# Altium PCB LimeFEA-mPCIe_1v0.PcbDoc (part 2 of 2)
Units mm, origin at the board's own origin, x right, y up, seen from the top; angles counter-clockwise.
Board outline 100 x 70 mm, 4 copper layers (Top Layer, Mid-Layer 1, Mid-Layer 2, Bottom Layer), stack 1.48 mm thick; 102 components, 83 nets, 520 pads, 498 vias.
Unrouted connection lines stored in the file: 11.
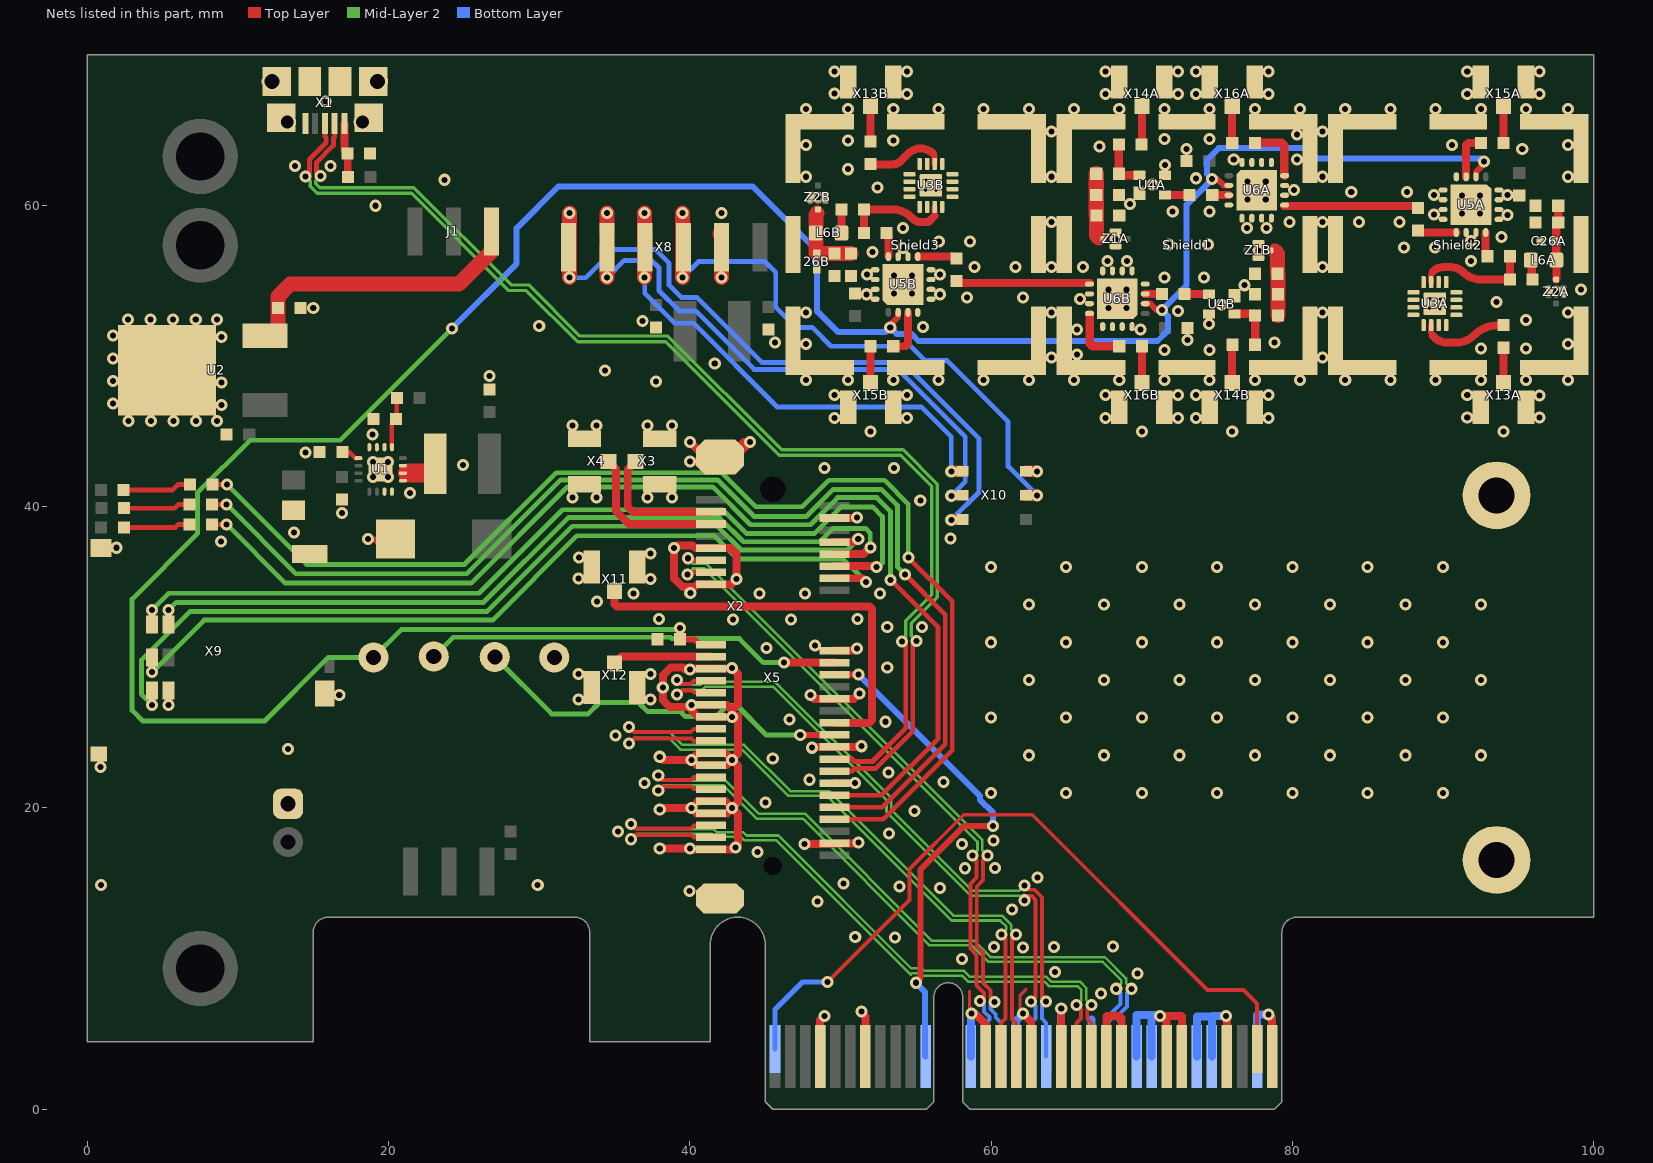
[diagram p4: the nets of this part, all layers, seen from the top]

## Via types
v1: diameter 0.8, hole 0.4, Top Layer to Bottom Layer, tented both sides, 470 vias
v2: diameter 0.8, hole 0.4, Top Layer to Bottom Layer, tented top, 20 vias
v3: diameter 0.4, hole 0.2, Top Layer to Bottom Layer, tented both sides, 8 vias

## Nets (pads, with @x,y where several pads share a name; then routed paths per layer and width w, separated by ;. In a path a pad name is that pad's centre, name@x,y a point inside that pad or via, vN(x,y) a via of type N, cw(c..) or ccw(c..) an arc to the next point about the centre after c; other vN are vias at no path point) (continued)
GND: 26B.1 C1.2 C2.2 C3.1 C4.2 C7.1 C8.2 C9.1 C10.1 C11.1 C12.1 C15A.2 C15B.2 C16A.2 C16B.2 C18A.2 C18B.2 C19A.2 C19B.2 C23A.2 C23B.2 C24A.2 C24B.2 C26A.1 GND1.1 R4.2 R6.1 Shield1.0 Shield2.0 Shield3.0 U1.0 U1.6 U1.7 U1.8 U1.15 U1.16 U2.2 U3A.1 U3A.3 U3A.4 U3A.5 U3A.6 U3A.7 U3A.8 U3A.9 U3A.10 U3A.12 U3A.13 U3A.14 U3A.15 U3A.16 U3A.PAD U3B.1 U3B.3 U3B.4 U3B.5 U3B.6 U3B.7 U3B.8 U3B.9 U3B.10 U3B.12 U3B.13 U3B.14 U3B.15 U3B.16 U3B.PAD U4A.2 U4A.4 U4B.2 U4B.4 U5A.0 U5A.4 U5A.5 U5A.6 U5A.7 U5A.8 U5A.10 U5A.11 U5A.13 U5A.14 U5A.15 U5A.16 U5B.0 U5B.4 U5B.5 U5B.6 U5B.7 U5B.8 U5B.10 U5B.11 U5B.13 U5B.14 U5B.15 U5B.16 U6A.0 U6A.4 U6A.5 U6A.6 U6A.7 U6A.8 U6A.10 U6A.11 U6A.13 U6A.14 U6A.15 U6A.16 U6B.0 U6B.4 U6B.5 U6B.6 U6B.7 U6B.8 U6B.10 U6B.11 U6B.13 U6B.14 U6B.15 U6B.16 X1.0 X1.5 X2.A4 X2.A12 X2.A15 X2.A18 X2.A20 X2.A23 X2.A24 X2.A27 X2.A28 X2.A31 X2.B4 X2.B7 X2.B13 X2.B16 X2.B18 X2.B21 X2.B22 X2.B25 X2.B26 X2.B29 X2.B32 X3.2 X4.2 X5.0 X5.4 X5.9 X5.15 X5.18 X5.21 X5.26 X5.27 X5.29 X5.34 X5.35 X5.37 X5.40 X5.43 X5.45 X5.50 X5.51 X6.0 X7.0 X8.5 X9.0 X9.5 X10.6 X11.2 X12.2 X13A.2 X13B.2 X14A.2 X14B.2 X15A.2 X15B.2 X16A.2 X16B.2 X17.1 Z1A.2 Z1B.2 Z2A.2 Z2B.2 | length 164.7
  Top Layer w0.203: 58.548,7.851 58.548,6.502 v1(58.7,6.35) ; v1(62.125,6.35) 61.925,6.55 61.925,7.58 62.32,7.975
  Top Layer w0.53: C8.2@19.225,37.787 19.425,37.587 C8.2@20.775,37.587 ; v1(38,17.3) v1(40,17.3) 40.002,17.3 40.101,17.201 40.15,17.25 X5.51@41.4,17.25 v1@42.8,17.25 ; v1(38,19.9) 38.1,20 v1(40.1,20) ; v1(38,23.4) 38.2,23.2 v1(40.1,23.2) ; v1(40,43) 41.7,43 X5.0@42,43.3 ; v1(40,44.3) 41,43.3 X5.0@42,43.3 ; X5.0@42.3,43 43.6,44.3 v1(44,44.3) ; v1(43.025,17.375) 43.2,17.55 43.2,19.6 v1(42.8,20) ; v1@44.002,44.302 42.5,42.8 X5.0@42,43.3 ; v1(47.6,17.6) 49.55,17.6 X5.50@49.6,17.65 51.15,17.65 v1(51.2,17.7) ; v1(48,27.5) 48.25,27.25 X5.26@49.6,27.25 50.9,27.25 v1(51.25,27.6) ; v1(48.1,24) 48.15,24.05 X5.34@49.6,24.05 51.05,24.05 51.1,24.1 v1(51.4,24.1) ; X2.B4@48.65,3.5 48.65,5.9 v1(48.95,6.2) ; X5.40@49.6,21.65 v1(50.95,21.65) ; X5.18@49.6,30.45 50.95,30.45 v1(51.1,30.6) ; v1@50.95,39.25 51.076,39.25 v1(51.102,39.277) ; v1(51.4,6.5) 51.4,6.4 51.65,6.15 X2.B7@51.65,3.5 ; v1(58.7,6.35) 58.925,6.35 59.65,5.625 X2.B13@59.65,3.5 ; v1(62.125,6.35) 62.65,5.825 X2.B16@62.65,3.5 ; X2.B18@64.65,3.5 v1(64.65,6.7) ; X2.B21@67.65,3.5 67.65,6.15 67.7,6.2 68.5,6.2 68.65,6.05 X2.B22@68.65,3.5 ; X2.B25@71.65,3.5 71.65,6.2 v1(71.2,6.2) 72.6,6.2 72.65,6.15 X2.B26@72.65,3.5 ; v1(75.6,6.2) 75.65,6.15 X2.B29@75.65,3.5 ; v1(78.4,6.3) 78.65,6.05 X2.B32@78.65,3.5 ; v1(40.1,20) 40.55,20.45 X5.43@41.4,20.45 42.35,20.45 v1(42.8,20) ; v1(40.1,20) 40.45,19.65 X5.45@41.4,19.65 42.45,19.65 v1(42.8,20) ; v1(40.1,23.2) 40.55,23.65 X5.35@41.4,23.65 42.35,23.65 v1(42.8,23.2) ; v1(40.1,23.2) 40.45,22.85 X5.37@41.4,22.85 42.45,22.85 v1(42.8,23.2) ; v1(40.1,26.825) 39.985,26.71 38.665,26.71 38.2,27.175 v1(38.2,28) 38.2,28.8 38.74,29.34 39.549,29.34 39.689,29.2 v1(40,29.2) 40.05,29.25 X5.21@41.4,29.25 42.75,29.25 v1(42.8,29.3) 43.2,28.9 43.2,26.9 42.8,26.5 ; v1(40.1,26.825) 40.425,26.825 40.45,26.85 X5.27@41.4,26.85 42.45,26.85 42.8,26.5 ; v1(40.1,26.825) 40.1,26.5 40.55,26.05 X5.29@41.4,26.05 v1(42.8,26.05) ; v1(42.8,20) 43.2,20.4 43.2,22.8 v1(42.8,23.2) ; v1(42.8,23.2) 43.2,23.6 43.2,26.1 43.15,26.05 v1(42.8,26.05) ; v1(42.8,26.05) 42.8,26.5 ; 38.952,35.249 v1(38.952,37.252) 39.13,37.43 40.183,37.43 40.363,37.25 X5.9@41.4,37.25 42.7,37.25 43.1,36.85 v1(43.1,35.2) 42.75,34.85 X5.15@41.4,34.85 40.5,34.85 40.32,34.67 39.531,34.67 38.952,35.249
  Top Layer w0.56: X9.0@0.95,37.32 0.995,37.275 v1(1.925,37.275) ; v1(5.4,26.825) X9.5@5.4,27.81 ; X5.4@49.6,39.25 v1@50.95,39.25
  Top Layer w0.75: X10.6@62.3,42.35 v1(63.05,42.35)
  Top Layer w1: v1(42.1,55.2) 42.1,58.015 42,58.115 X8.5@42.11,58.225
  Bottom Layer w0.53: X2.A4@48.65,3.5 48.65,5.9 v1(48.95,6.2) ; X2.A12@58.65,3.5 58.65,6.3 v1(58.7,6.35) ; X2.A15@61.65,3.5 61.65,5.875 v1(62.125,6.35) ; X2.A18@64.65,3.5 v1(64.65,6.7) ; X2.A20@66.65,3.5 66.65,5.95 ; X2.A23@69.65,3.5 69.65,6.25 70.7,6.25 ; X2.A24@70.65,3.5 70.65,6.2 70.7,6.25 ; v1(71.2,6.2) 71.15,6.25 70.7,6.25 ; X2.A27@73.65,3.5 73.65,6.15 74.65,6.15 ; X2.A28@74.65,3.5 74.65,6.15 ; v1(75.6,6.2) 74.7,6.2 74.65,6.15 ; X2.A31@77.65,3.5 77.65,6.25 77.7,6.3 v1(78.4,6.3)
  other v1: 67.3,7.7 69.7,9 64.225,9.125 58.075,9.975 62.1,10.75 60.2,10.775 64.175,10.775 68.1,10.8 53.625,11.4 50.975,11.425 61.375,13.275 48.475,13.8 39.977,14.476 56.6,14.7 53.9,14.8 0.9,14.9 29.9,14.9 50.2,15 63.075,15.375 58.25,16 60.25,16.025 44.5,17.075 58.05,17.6 60.15,17.85 53.225,18.3 35.225,18.425 54.9,19.8 45.025,20.375 60,21 64.98,21 70,21 74.98,21 80,21 84.98,21 90,21 37,21.65 56.825,21.725 47.925,21.875 53.17,22.35 0.875,22.725 45.5,23.3 62.5,23.5 67.5,23.5 72.5,23.5 77.5,23.5 82.5,23.5 87.5,23.5 92.5,23.5 13.335,23.912 35.075,24.825 52.975,25.725 46.625,25.889 60,26 64.98,26 70,26 74.98,26 80,26 84.98,26 90,26 32.6,27.2 37.4,27.2 16.725,27.5 62.5,28.5 67.5,28.5 72.5,28.5 77.5,28.5 82.5,28.5 87.5,28.5 92.5,28.5 32.6,28.9 37.4,28.9 53.1,29.325 45.1,30.632 48.3,30.775 60,31 64.98,31 70,31 74.98,31 80,31 84.98,31 90,31 53.1,32 55.403,32.027 42.85,32.525 46.725,32.525 37.95,32.55 51.125,32.55 62.5,33.5 67.5,33.5 72.5,33.5 77.5,33.5 82.5,33.5 87.5,33.5 92.5,33.5 33.825,33.7 36.25,34.25 44.625,34.25 47.65,34.25 52.625,34.25 40.025,34.275 37.4,35.2 32.6,35.225 60,36 64.98,36 70,36 74.98,36 80,36 84.98,36 90,36 32.625,36.625 37.4,36.9 8.875,37.7 18.625,37.846 57.3,37.9 13.725,38.3 16.9,39.575 55.292,40.425 32.2,40.6 33.8,40.6 37.2,40.6 38.8,40.6 21.427,40.9 48.925,42.575 53.55,42.575 24.928,42.775 14.493,43.6 18.937,44.794 52,45 70,45 76,45 94,45 32.2,45.4 33.8,45.4 37.2,45.4 38.8,45.4 2.725,45.675 4.225,45.675 5.725,45.675 7.225,45.675 8.6,45.675 49.6,45.9 54.4,45.9 67.6,45.9 72.4,45.9 73.6,45.9 78.4,45.9 91.6,45.925 96.4,45.925 8.9,46.75 1.7,46.85 96.4,47.375 49.6,47.4 54.4,47.4 67.6,47.4 72.4,47.4 73.6,47.4 78.4,47.4 91.6,47.4 8.9,48.25 37.745,48.3 1.7,48.35 47.7,48.4 50.5,48.4 53.5,48.4 56.5,48.4 59.5,48.4 62.5,48.4 65.5,48.4 68.5,48.4 71.5,48.4 74.5,48.4 77.5,48.4 80.5,48.4 83.5,48.4 86.5,48.4 89.5,48.4 92.5,48.4 95.5,48.4 98.3,48.4 26.688,48.669 34.363,49.037 41.65,49.5 1.7,49.85 64,49.9 82,49.9 65.7,50.1 71.5,50.4 74.5,50.4 92.5,50.5 95.5,50.5 47.7,50.8 98.3,50.8 45.65,50.9 78.8,50.9 73.025,51.05 8.9,51.25 1.7,51.35 65.7,51.75 69.9,51.75 55.475,51.925 30,52 74.45,52.125 36.85,52.325 95.5,52.4 2.7,52.425 4.2,52.425 5.7,52.425 7.2,52.425 8.6,52.425 47.7,52.9 64,52.9 82,52.9 98.3,52.9 72.4,53 15,53.2 75.3,53.425 93.55,53.6 65.9,53.8 58.4,53.9 62.1,53.9 51.725,54.1 56.6,54.1 97.5,54.275 99.15,54.407 76.8,54.7 71.5,55.2 74.125,55.2 51.75,55.425 56.6,55.425 58.9,55.9 61.6,55.9 64,55.9 66.1,55.9 82,55.9 67.725,56.3 69.025,56.3 91.85,56.3 52.125,56.9 77.737,57.019 54.15,57.175 87.4,57.2 89.45,57.2 71.8,57.4 74.4,57.4 56.55,57.6 58.6,57.6 91.85,57.625 68.263,57.781 93.875,57.9 54.15,58.5 76.975,58.5 78.275,58.5 64,58.9 79.8,58.9 82,58.9 84.4,58.9 87.1,58.9 94.275,59.375 89.4,59.4 42.1,59.5 72.05,59.6 74.5,59.6 19.125,59.975 69.2,60.1 48.5,60.525 89.4,60.7 94.275,60.7 83.9,60.9 87.6,60.9 80.1,61.025 52.45,61.2 70.7,61.375 23.7,61.7 73.6,61.8 47.7,61.9 64,61.9 82,61.9 98.3,61.9 50.5,62.4 13.775,62.625 16.15,62.625 71.55,62.675 76.1,63.05 80.3,63.05 72.975,63.75 95.25,63.75 67.2,63.9 47.7,64 90.6,64 98.3,64 50.5,64.3 53.5,64.3 71.5,64.4 74.5,64.4 80.3,64.7 64,64.9 82,64.9 47.7,66.4 50.5,66.4 53.5,66.4 56.5,66.4 59.5,66.4 62.5,66.4 65.5,66.4 68.5,66.4 71.5,66.4 74.5,66.4 77.5,66.4 80.5,66.4 83.5,66.4 86.5,66.4 89.5,66.4 92.5,66.4 95.5,66.4 98.3,66.4 15.8,66.9 54.4,67.4 67.6,67.4 72.4,67.4 73.6,67.4 78.4,67.4 91.6,67.4 96.4,67.4 49.6,67.425 49.6,68.875 54.4,68.875 67.6,68.9 72.4,68.9 73.6,68.9 78.4,68.9 91.6,68.9 96.4,68.9
  other v2: 18.975,41.975 19.975,41.975 18.975,42.975 19.975,42.975 67.775,53.2 68.975,53.2 53.55,54.15 54.75,54.15 67.775,54.4 68.975,54.4 53.55,55.35 54.75,55.35 91.25,59.45 92.45,59.45 77.025,60.4 78.225,60.4 91.25,60.65 92.45,60.65 77.025,61.6 78.225,61.6
  other v3: 89.775,53.125 89.1,53.15 89.8,53.8 89.125,53.825 56.325,60.975 55.65,61 56.35,61.65 55.675,61.675
GPIO1: X3.1 X5.3 | length 8.9
  Top Layer w0.53: X3.1@36.4,43 35.875,42.475 35.875,40 36.225,39.65 X5.3@41.4,39.65
GPIO2: X4.1 X5.5 | length 10.2
  Top Layer w0.53: X4.1@34.6,43 35.1,42.5 35.1,39.7 35.95,38.85 X5.5@41.4,38.85
GPIO8: GPIO8.1 X5.32 | length 25.9
  Top Layer w0.4: v1(47.325,24.85) X5.32@49.6,24.85
  Mid-Layer 2 w0.33: GPIO8.1@27.05,30.025 30.825,26.25 33.25,26.25 34,27 36.595,27 36.685,26.91 36.685,26.904 37.104,26.485 37.11,26.485 37.198,26.398 37.2,26.4 39.375,26.4 39.7,26.075 41.749,26.075 42.474,26.8 43.126,26.8 45.076,24.85 v1(47.325,24.85)
LED_WLAN#_GPIO6: R8.1 X5.44 | length 78.4
  Top Layer w0.32: R8.1@8.275,40.139 9.239,40.139 v1(9.25,40.15) ; X5.44@49.6,20.05 52.775,20.05 56.945,24.22 56.945,32.834 v1(54.278,35.502)
  Mid-Layer 2 w0.32: v1(9.25,40.15) 13.85,35.55 25.2,35.55 31.43,41.78 41.832,41.78 44.262,39.35 47.725,39.35 49.525,41.15 52.71,41.15 53.79,40.07 53.79,35.989 v1(54.278,35.502)
LED_WPAN#_GPIO7: R9.1 X5.46 | length 80.5
  Top Layer w0.32: R9.1@8.305,41.475 v1(9.28,41.476) ; X5.46@49.6,19.25 52.825,19.25 57.415,23.84 57.415,33.71 v1(54.5,36.625)
  Mid-Layer 2 w0.32: v1@9.25,41.475 14.56,36.165 25.04,36.165 31.125,42.25 42.125,42.25 44.385,39.99 47.456,39.99 49.216,41.75 52.925,41.75 54.5,40.175 v1(54.5,36.625)
LED_WWAN#_GPIO5: R7.1 X5.42 | length 76.3
  Top Layer w0.32: R7.1@8.275,38.824 v1@9.249,38.824 ; X5.42@49.6,20.85 49.61,20.84 52.715,20.84 56.475,24.6 56.475,31.99 v1(53.325,35.14)
  Mid-Layer 2 w0.32: v1(9.25,38.825) 13.15,34.925 25.492,34.925 31.877,41.31 41.515,41.31 44.025,38.8 48.005,38.8 49.805,40.6 52.415,40.6 53.313,39.701 53.313,35.152 v1(53.325,35.14)
MHZ_IN: X5.19 X12.1 | length 6.6
  Top Layer w0.53: X12.1@35,29.6 35.45,30.05 X5.19@41.4,30.05
MHZ_OUT: X5.30 X11.1 | length 28
  Top Layer w0.53: X11.1@35,34.4 35,33.525 35.15,33.375 51.925,33.375 52.08,33.22 52.08,25.83 51.9,25.65 X5.30@49.6,25.65
Net26B_2: 26B.2 C18B.1 C19B.1 L6B.1 Z2B.3 | length 4.9
  Top Layer w1: 26B.2@48.362,56.834 L6B.1@48.362,58.175 48.362,59.232 cw(c48.832,59.232) 48.431,59.477 ; 26B.2@48.481,56.815 C19B.1@49.6,56.815 C18B.1@50.68,56.815
NetC2_1: C2.1 L1.1 X1.1 | length 3.6
  Top Layer w0.5: X1.1@17.075,65.425 17.075,63.65 C2.1@17.275,63.45 17.3,63.425 L1.1@17.3,61.875
NetC4_1: C4.1 U1.9 | length 1.2
  Top Layer w0.3: C4.1@16.927,43.625 17.4,43.625 17.8,43.225 U1.9@18,43.225
NetC10_2: C10.2 J1.3 U2.3 | length 20.4
  Top Layer w1: U2.3@11.477,51.35 U2.3@11.8,51.35 12.5,51.35 12.654,51.504 C10.2@12.654,53.2 12.654,53.954 13.475,54.775 24.675,54.775 26.84,56.94 J1.3@26.84,58.275
NetC13A_1: C13A.1 X13A.1 | length 2.4
  Top Layer w0.53: X13A.1@94,48.2 C13A.1@94,50.55
NetC13A_2: C13A.2 U3A.2 | length 5.9
  Top Layer w0.4: U3A.2@89.2,52.05 89.2,51.634 ccw(c89.627,51.634) 89.325,51.332
  Top Layer w0.53: 89.325,51.332 89.444,51.213 ccw(c90.2,51.969) 90.2,50.9 90.917,50.9 ccw(c90.917,52.466) 92.024,51.359 cw(c93.693,49.69) 93.693,52.05 C13A.2@94,52.05 C13A.2@93.975,52.075
NetC13B_1: C13B.1 X13B.1 | length 2.4
  Top Layer w0.53: C13B.1@52,64.25 X13B.1@52,66.6
NetC13B_2: C13B.2 U3B.2 | length 5.3
  Top Layer w0.4: 56.14,63.45 cw(c55.875,63.185) 56.25,63.185 U3B.2@56.25,62.75
  Top Layer w0.53: C13B.2@52,62.75 52.025,62.725 53.487,62.725 ccw(c53.487,63.419) 53.978,62.928 54.495,63.445 cw(c55.292,62.647) 55.292,63.775 cw(c55.292,62.505) 56.14,63.45
NetC14A_1: C14A.1 X14A.1 | length 2.6
  Top Layer w0.53: C14A.1@69.975,64.05 70,64.075 X14A.1@70,66.6
NetC14A_2: C14A.2 L4A.2 U4A.1 | length 3.4
  Top Layer w0.56: C14A.2@68.475,64.05 L4A.2@68.475,62.1 68.575,62 U4A.1@69.85,62
NetC14B_1: C14B.1 X14B.1 | length 2.6
  Top Layer w0.53: X14B.1@76,48.2 76,50.725 C14B.1@76.025,50.75
NetC14B_2: C14B.2 L4B.2 U4B.1 | length 3.4
  Top Layer w0.56: U4B.1@76.15,52.8 77.425,52.8 L4B.2@77.525,52.7 C14B.2@77.525,50.75
NetC15A_1: C15A.1 C16A.1 L4A.1 Z1A.3 | length 4.4
  Top Layer w1: L4A.1@66.975,62.1 C16A.1@66.975,60.7 66.975,59.362 C15A.1@67,59.337 67,57.988 67.163,57.825
NetC15B_1: C15B.1 C16B.1 L4B.1 Z1B.3 | length 4.4
  Top Layer w1: 78.837,56.975 79,56.812 C15B.1@79,55.463 79.025,55.438 C16B.1@79.025,54.1 L4B.1@79.025,52.7
NetC17A_1: C17A.1 U6A.9 | length 9.1
  Top Layer w0.53: U6A.9@79.425,59.95 88.3,59.95 C17A.1@88.425,59.825
NetC17A_2: C17A.2 U5A.9 | length 2.5
  Top Layer w0.53: C17A.2@88.425,58.275 88.5,58.2 U5A.9@90.875,58.2
NetC17B_1: C17B.1 U6B.9 | length 9.1
  Top Layer w0.53: C17B.1@57.575,54.975 57.7,54.85 U6B.9@66.575,54.85
NetC17B_2: C17B.2 U5B.9 | length 2.5
  Top Layer w0.53: U5B.9@55.125,56.6 57.5,56.6 C17B.2@57.575,56.525
NetC18A_1: C18A.1 C19A.1 C26A.2 L6A.1 Z2A.3 | length 4.9
  Top Layer w0.56: Z2A.3@97.5,55.105 97.522,55.127 L6A.1@97.522,56.363 97.511,56.374 97.511,57.614 C26A.2@97.5,57.625 97.52,57.645 97.52,58.758 C18A.1@97.639,58.877 C19A.1@97.639,59.977
NetC20A_1: C20A.1 L5A.2 U3A.11 | length 7.7
  Top Layer w0.4: U3A.11@89.2,54.9 89.2,55.31 cw(c89.641,55.31) 89.329,55.622
  Top Layer w0.53: 89.329,55.622 cw(c90,54.951) 90,55.9 90.521,55.9 cw(c90.521,54.743) 91.339,55.561 ccw(c92.513,56.735) 92.513,55.075 L5A.2@94.438,55.075 C20A.1@94.438,56.625
NetC20A_2: C20A.2 U5A.12 | length 1.6
  Top Layer w0.53: U5A.12@92.825,58.2 92.825,56.738 C20A.2@92.938,56.625
NetC20B_1: C20B.1 L5B.2 U3B.11 | length 7.2
  Top Layer w0.4: 56.25,59.337 U3B.11@56.25,59.9
  Top Layer w0.53: C20B.1@51.562,58.175 L5B.2@51.562,59.725 53.487,59.725 cw(c53.487,58.065) 54.661,59.239 54.75,59.15 ccw(c55.354,59.754) 55.354,58.9 55.75,58.9 ccw(c55.75,59.124) 55.909,58.966 56.25,59.307
NetC20B_2: C20B.2 U5B.12 | length 1.6
  Top Layer w0.53: C20B.2@53.062,58.175 53.175,58.062 U5B.12@53.175,56.6
NetC21A_1: C21A.1 U6A.12 | length 4
  Top Layer w0.56: C21A.1@77.5,64.15 79.3,64.15 79.45,64 79.45,62 U6A.12@79.475,61.975
NetC21A_2: C21A.2 X16A.1 | length 2.5
  Top Layer w0.53: C21A.2@76,64.15 X16A.1@76,66.6
NetC21B_1: C21B.1 U6B.12 | length 4
  Top Layer w0.56: U6B.12@66.525,52.825 66.55,52.8 66.55,50.8 66.7,50.65 C21B.1@68.5,50.65
NetC21B_2: C21B.2 X16B.1 | length 2.5
  Top Layer w0.53: X16B.1@70,48.2 C21B.2@70,50.65
NetC22A_1: C22A.1 U4A.3 | length 1.6
  Top Layer w0.53: U4A.3@71.55,60.7 71.554,60.696 C22A.1@73.175,60.696
NetC22A_2: C22A.2 U6A.3 | length 1.1
  Top Layer w0.53: C22A.2@74.675,60.696 74.696,60.675 U6A.3@75.775,60.675
NetC22B_1: C22B.1 U4B.3 | length 1.6
  Top Layer w0.53: C22B.1@72.825,54.104 74.446,54.104 U4B.3@74.45,54.1
NetC22B_2: C22B.2 U6B.3 | length 1.1
  Top Layer w0.53: U6B.3@70.225,54.125 71.304,54.125 C22B.2@71.325,54.104
NetC25A_1: C25A.1 U5A.3 | length 3.1
  Top Layer w0.53: U5A.3@91.525,61.9 91.525,64 91.675,64.15 C25A.1@92.5,64.15
NetC25A_2: C25A.2 X15A.1 | length 2.5
  Top Layer w0.53: C25A.2@94,64.15 X15A.1@94,66.6
NetC25B_1: C25B.1 U5B.3 | length 3.1
  Top Layer w0.53: C25B.1@53.5,50.65 54.325,50.65 54.475,50.8 U5B.3@54.475,52.9
NetC25B_2: C25B.2 X15B.1 | length 2.5
  Top Layer w0.53: X15B.1@52,48.2 C25B.2@52,50.65
NetL2_1: L2.1 U1.1 U1.2 U1.3 | length 2.8
  Top Layer w1.27: 21.25,42.225 23.175,42.225 23.1,42.3 L2.1@23.1,43.025
NetL5A_1: L5A.1 L6A.2 | length 1.3
  Top Layer w0.56: L6A.2@95.822,56.363 95.88,56.305 95.88,55.133 L5A.1@95.938,55.075
NetL5B_1: L5B.1 L6B.2 | length 1.6
  Top Layer w0.53: L6B.2@50.062,58.175 L5B.1@50.062,59.725
NetLED1_1: LED1.1 R7.2 | length 4.4
  Top Layer w0.32: LED1.1@2.425,38.625 5.85,38.625 6.05,38.825 R7.2@6.775,38.824
NetLED2_1: LED2.1 R8.2 | length 4.4
  Top Layer w0.32: LED2.1@2.45,39.9 5.8,39.9 6.037,40.137 6.773,40.137 R8.2@6.775,40.139
NetLED3_1: LED3.1 R9.2 | length 4.5
  Top Layer w0.32: LED3.1@2.412,41.1 5.65,41.1 6.025,41.475 R9.2@6.774,41.475
NetR4_1: R4.1 R5.1 U1.5 | length 3.4
  Top Layer w0.3: U1.5@20.225,43.95 20.225,45.55 R4.1@20.5,45.825 20.546,45.871 R5.1@20.546,47.225
PCI_PERST#: X2.A11 X5.22 | length 34.2
  Top Layer w0.4: X5.22@49.6,28.85 v1(51.2,28.85) ; v1(55,8.4) 55.3,8.7 55.3,15.911 58.189,18.8 v1(60.125,18.8)
  Bottom Layer w0.4: v1(51.2,28.85) 59.242,20.808 59.242,20.558 60.125,19.675 v1(60.125,18.8) ; v1(55,8.4) 55.6,7.8 55.6,3.55 X2.A11@55.65,3.5
PCI_REF_CLK_N: X2.A14 X5.11 | length 44.7
  Top Layer w0.26: v1(59.75,16.85) 59.462,16.562 59.462,15.212 59.042,14.792 59.042,10.851 59.462,10.431 59.462,8.387 59.95,7.9 59.95,7.403 v1(60.228,7.125)
  Top Layer w0.32: v1@39.848,36.449 39.877,36.449 v1@39.947,36.449 ; v1(39.877,36.577) 39.877,36.519 v1@39.947,36.449 ; v1@39.949,36.447 v1@39.947,36.449 ; X5.11@41.4,36.45 40.27,36.45 v1@39.947,36.449
  Mid-Layer 2 w0.17: v1(39.877,36.577) 39.877,36.519 40.176,36.22 ; 40.178,36.218 40.176,36.22 ; v1(59.75,16.85) 59.41,17.19 59.41,17.886 41.078,36.218 40.882,36.218 40.88,36.22 40.176,36.22
  Bottom Layer w0.26: v1(60.228,7.125) 59.951,6.849 59.951,6.65 60.3,6.301 60.3,6.08 60.65,5.73 X2.A14@60.65,3.5
PCI_REF_CLK_P: X2.A13 X5.13 | length 44.6
  Top Layer w0.26: v1(58.75,16.85) 59.037,16.562 59.037,15.389 58.617,14.968 58.617,10.675 59.037,10.255 59.037,8.211 59.525,7.724 59.525,7.45 v1(59.25,7.175)
  Top Layer w0.32: v1@39.825,35.646 39.851,35.647 X5.13@40.775,35.65 ; 40.275,35.65 X5.13@40.775,35.65 ; X5.13@41.4,35.65 X5.13@40.775,35.65
  Mid-Layer 2 w0.17: v1(39.852,35.502) 39.848,35.502 39.825,35.525 40.198,35.898 40.945,35.898 59.09,17.754 59.09,17.19 v1(58.75,16.85)
  Bottom Layer w0.26: v1(59.25,7.175) 59.526,6.899 59.526,6.474 59.875,6.125 59.875,5.955 59.65,5.73 X2.A13@59.65,3.5
PCI_RX0_N: X2.B15 X5.31 | length 45.6
  Top Layer w0.26: v1(35.95,25.375) 36.287,25.037 40.058,25.037 40.27,25.25 X5.31@41.4,25.25 ; X2.B15@61.65,3.5 61.65,5.73 61.375,6.005 61.375,11.325 v1(61.65,11.6)
  Mid-Layer 2 w0.17: v1(35.95,25.375) 36.34,24.985 38.718,24.985 39.508,24.195 43.605,24.195 46.68,21.12 49.23,21.12 57.5,12.85 60.73,12.85 61.323,12.258 61.323,11.927 v1(61.65,11.6)
PCI_RX0_P: X2.B14 X5.33 | length 45
  Top Layer w0.26: v1(35.95,24.275) 36.287,24.612 ; 36.34,24.612 40.108,24.612 40.27,24.45 X5.33@41.4,24.45 ; X2.B14@60.65,3.5 60.65,5.73 60.95,6.03 60.95,11.325 v1(60.675,11.6)
  Mid-Layer 2 w0.17: v1(35.95,24.275) 36.34,24.665 38.585,24.665 39.375,23.875 43.472,23.875 46.547,20.8 49.097,20.8 57.367,12.53 60.597,12.53 61.003,12.125 61.003,11.928 v1(60.675,11.6)
PCI_RX1_N: X2.B20 X5.47 | length 45.1
  Top Layer w0.26: v1(36.1,18.925) 36.388,18.638 ; 36.43,18.638 40.058,18.638 40.27,18.85 X5.47@41.4,18.85 ; X2.B20@66.65,3.5 66.65,5.73 66.375,6.005 66.375,6.65 v1(66.65,6.925)
  Mid-Layer 2 w0.17: v1(36.1,18.925) 36.43,18.595 41.583,18.595 41.778,18.4 43.538,18.4 43.763,18.175 45.875,18.175 54.695,9.355 55.396,9.355 55.556,9.195 58.208,9.195 58.608,8.795 63.657,8.795 63.962,8.49 63.978,8.475 65.893,8.475 66.31,8.058 66.31,7.265 v1(66.65,6.925)
PCI_RX1_P: X2.B19 X5.49 | length 44.7
  Top Layer w0.26: v1(36.1,17.925) 36.387,18.213 40.107,18.213 40.27,18.05 X5.49@41.4,18.05 ; X2.B19@65.65,3.5 65.65,5.73 65.95,6.03 65.95,6.625 v1(65.65,6.925)
  Mid-Layer 2 w0.17: v1(36.1,17.925) 36.45,18.275 41.45,18.275 41.645,18.08 43.405,18.08 43.63,17.855 45.742,17.855 54.65,8.948 54.737,9.035 55.263,9.035 55.423,8.875 58.075,8.875 58.475,8.475 63.524,8.475 63.829,8.17 ; 63.83,8.17 63.845,8.155 65.76,8.155 65.99,7.925 65.99,7.265 v1(65.65,6.925)
PCI_TX0_N: X2.A17 X5.23 | length 44.5
  Top Layer w0.26: v1(39.15,28.5) 39.425,28.225 40.045,28.225 40.27,28.45 X5.23@41.4,28.45 ; v1(62.2,14.85) 62.475,14.575 62.876,14.575 63.375,14.076 63.375,7.425 v1(63.65,7.15)
  Mid-Layer 2 w0.17: v1(39.15,28.5) 39.478,28.172 40.712,28.172 40.915,28.375 45.653,28.375 53.37,20.658 53.37,19.88 58.75,14.5 61.85,14.5 v1(62.2,14.85)
  Bottom Layer w0.26: X2.A17@63.65,3.5 63.65,5.73 63.363,6.017 63.363,6.863 v1(63.65,7.15)
PCI_TX0_P: X2.A16 X5.25 | length 43.8
  Top Layer w0.26: v1(39.15,27.525) 39.425,27.8 40.12,27.8 40.27,27.65 X5.25@41.4,27.65 ; v1(62.2,13.875) 62.475,14.15 62.7,14.15 62.95,13.9 62.95,7.45 v1(62.65,7.15)
  Mid-Layer 2 w0.17: v1(39.15,27.525) 39.478,27.852 40.845,27.852 41.047,28.055 45.52,28.055 53.05,20.525 53.05,19.747 58.617,14.18 61.895,14.18 v1(62.2,13.875)
  Bottom Layer w0.26: X2.A16@62.65,3.5 62.65,5.73 62.938,6.018 62.938,6.862 v1(62.65,7.15)
PCI_TX1_N: X2.A22 X5.39 | length 46
  Top Layer w0.26: v1(37.9,22.15) 38.188,21.863 ; 38.235,21.863 40.083,21.863 40.27,22.05 X5.39@41.4,22.05
  Mid-Layer 2 w0.17: v1(37.9,22.15) 38.235,21.815 42.362,21.815 44.558,19.62 47.63,19.62 56.05,11.2 58.852,11.2 59.947,10.105 67.537,10.105 68.96,8.683 68.96,8.34 v1(69.3,8)
  Bottom Layer w0.26: X2.A22@68.65,3.5 68.65,5.73 68.45,5.93 68.45,6.249 69.013,6.811 69.013,7.712 v1(69.3,8)
PCI_TX1_P: X2.A21 X5.41 | length 45.6
  Top Layer w0.26: v1(37.9,21.15) 38.187,21.438 40.082,21.438 40.27,21.25 X5.41@41.4,21.25
  Mid-Layer 2 w0.17: v1(37.9,21.15) 38.245,21.495 42.23,21.495 44.425,19.3 47.497,19.3 55.917,10.88 58.719,10.88 59.814,9.785 67.405,9.785 68.64,8.55 68.64,8.34 v1(68.3,8)
  Bottom Layer w0.26: X2.A21@67.65,3.5 67.65,5.675 68.025,6.05 68.025,6.425 68.588,6.987 68.588,7.712 v1(68.3,8)
SIZEX4: X2.A1 X2.B31 | length 49.4
  Top Layer w0.254: v1(49.125,8.45) 54.577,13.902 54.577,15.952 58.175,19.55 62.723,19.55 74.348,7.925 76.75,7.925 77.65,7.025 X2.B31@77.65,4
  Bottom Layer w0.32: X2.A1@45.65,4 45.65,6.625 47.475,8.45 v1(49.125,8.45)
TCK: X8.4 X10.5 | length 38.6
  Top Layer w0.75: X10.5@62.3,40.75 v1(63.05,40.75)
  Top Layer w1: v1(39.5,55.2) 39.5,57.155 X8.4@39.57,57.225 39.5,57.295 v1(39.5,59.5) ; X8.4@39.57,58.225 X8.4@39.575,58.22
  Bottom Layer w0.32: v1(39.5,55.2) 40.575,56.275 44.979,56.275 45.7,55.554 45.7,53.225 47.025,51.9 48.116,51.9 49.366,50.65 54.675,50.65 55.625,49.7 57.075,49.7 61.125,45.65 61.125,42.675 v1(63.05,40.75)
TDD_GPIO3_N: GPIO3N.1 R6.2 U5A.2 U5B.2 U6A.2 U6B.2 X5.17 | length 176.8
  Top Layer w0.4: v1(39.35,31.95) 39.35,31.35 39.525,31.175 40.325,31.175 40.65,30.85 X5.17@41.4,30.85 ; v1(53.3,51.9) 53.3,52.075 53.825,52.6 U5B.2@53.825,52.9 ; U6B.2@70.225,53.475 70.575,53.475 70.997,53.053 v1(71.328,53.053) ; v1(74.672,61.747) 75.003,61.747 75.425,61.325 U6A.2@75.775,61.325 ; U5A.2@92.175,61.9 92.175,62.2 92.7,62.725 v1(92.7,62.9)
  Mid-Layer 2 w0.32: v1(24.2,51.825) 24.196,51.825 16.778,44.407 10.807,44.407 7.312,40.913 7.312,38.206 2.975,33.869 2.975,26.475 3.675,25.775 11.775,25.775 16,30 GPIO3N.1@19,30 20.84,31.84 39.24,31.84 v1(39.35,31.95)
  Bottom Layer w0.4: v1(24.2,51.825) 24.2,51.829 28.5,56.129 28.5,58.488 31.268,61.256 44.169,61.256 48.45,56.975 48.45,52.967 49.817,51.6 53,51.6 v1(53.3,51.9) 53.725,51.475 54.7,51.475 55.175,51 71.039,51 71.725,51.686 71.725,52.656 v1(71.328,53.053) 72.975,54.699 72.975,60.051 v1(74.672,61.747) 74.325,62.094 74.325,63.025 75.1,63.8 79.325,63.8 ; 79.3,63.775 79.325,63.8 ; v1(92.7,62.9) 92.5,63.1 81.65,63.1 80.95,63.8 79.325,63.8
TDD_GPIO3_P: GPIO3P.1 X5.20 | length 27.8
  Top Layer w0.53: v1(46.25,29.65) X5.20@49.6,29.65
  Mid-Layer 2 w0.32: GPIO3P.1@23,30.05 24.285,31.335 38.715,31.335 38.81,31.24 43.285,31.24 44.875,29.65 v1(46.25,29.65)
TDI: X8.2 X10.2 | length 39.7
  Top Layer w0.56: X8.2@34.49,56.265 X8.2@34.49,57.225 34.49,58.225 34.45,58.265 34.49,58.305 X8.2@34.5,58.315
  Top Layer w1: X8.2@34.49,57.225 34.5,57.215 v1(34.5,55.2) ; X8.2@34.49,58.225 34.49,58.305 34.49,59.49 v1(34.5,59.5)
  Bottom Layer w0.32: v1(34.5,55.2) 35.65,56.35 37.447,56.35 37.95,55.847 37.95,54.329 39.279,53 40.375,53 44.265,49.11 53.794,49.11 58.275,44.629 58.275,41.65 v1(57.35,40.725)
TDO: X8.3 X10.1 | length 33.7
  Top Layer w0.75: v1(57.35,42.35) X10.1@58.1,42.35
  Top Layer w1: v1(37,55.2) 37,57.195 X8.3@37.03,57.225 ; v1(37,59.5) 37,57.255 X8.3@37.03,57.225 ; X8.3@37.03,58.225 X8.3@37.03,57.225
  Bottom Layer w0.32: v1(37,55.2) 37,54.175 39,52.175 40.25,52.175 45.815,46.61 55.39,46.61 57.35,44.65 v1(57.35,42.35)
TMS: X8.1 X10.3 | length 45.2
  Top Layer w0.75: v1(57.35,39.125) 57.375,39.15 X10.3@58.1,39.15
  Top Layer w1: X8.1@31.95,57.225 32,57.275 v1(32,59.5) ; v1(32,55.2) X8.1@32,57.175
  Bottom Layer w0.32: v1(32,55.2) 33.09,55.2 34.972,57.082 37.693,57.082 38.623,56.152 38.623,54.696 39.431,53.887 40.463,53.887 44.77,49.58 54.12,49.58 59.2,44.5 59.2,40.975 v1(57.35,39.125)
UIM_CLK: X5.12 X9.3 | length 60.2
  Top Layer w0.53: X9.3@4.3,32.19 v1(4.3,33.15) ; X5.12@49.6,36.05 52.35,36.05 v1(52.4,36)
  Mid-Layer 2 w0.32: v1(4.3,33.15) 5.4,34.25 26,34.25 31.545,39.795 42.169,39.795 43.739,38.225 48.275,38.225 50.037,39.987 52.128,39.987 52.775,39.34 52.775,36.25 v1@52.525,36
  Mid-Layer 2 w0.53: v1(52.4,36) v1@52.525,36
UIM_DIO: X5.10 X9.7 | length 54.7
  Top Layer w0.53: X9.7@5.4,32.19 v1(5.4,33.15) ; X5.10@49.6,36.85 51.526,36.85 v1(51.978,37.302)
  Mid-Layer 2 w0.32: v1(5.4,33.15) 5.9,33.65 26.3,33.65 31.925,39.275 41.96,39.275 43.56,37.675 48.625,37.675 49.51,38.56 51.665,38.56 51.978,38.247 v1(51.978,37.302)
UIM_RST: X5.14 X9.2 | length 55.6
  Top Layer w0.53: v1(4.3,29.025) X9.2@4.3,30 ; X5.14@49.6,35.25 51.45,35.25 v1(51.7,35)
  Mid-Layer 2 w0.32: v1(4.3,29.025) 7.75,32.475 26.9,32.475 32.5,38.075 41.625,38.075 43.175,36.525 50.175,36.525 v1(51.7,35)
UIM_VCC: X5.8 X9.1 | length 58.1
  Top Layer w0.53: v1(4.3,26.85) X9.1@4.3,27.81 ; X5.8@49.6,37.65 50.975,37.65 v1(51.175,37.85)
  Mid-Layer 2 w0.32: v1(4.3,26.85) 3.59,27.56 3.59,29.815 6.825,33.05 26.55,33.05 32.2,38.7 41.823,38.7 43.398,37.125 50.45,37.125 v1(51.175,37.85)
USB_D_N: X1.2 X5.38 | length 77.9
  Top Layer w0.32: v1@15.45,61.95 15.22,62.18 15.22,62.865 16.335,63.98 16.335,64.475 16.425,64.565 X1.2@16.425,65.425 ; X5.38@49.6,22.45 50.76,22.45 50.925,22.615 52.317,22.615 54.795,25.093 54.795,30.82 v1(55.05,31.075)
  Mid-Layer 2 w0.22: v1(15.476,61.953) 15.173,61.65 15.173,61.425 15.428,61.17 21.678,61.17 28.13,54.719 29.306,54.719 32.7,51.325 38.537,51.325 46.087,43.775 54.148,43.775 56.42,41.503 56.42,33.997 54.695,32.272 54.695,31.43 v1(55.05,31.075)
USB_D_P: X1.3 X5.36 | length 77.1
  Top Layer w0.32: v1(14.5,61.925) 14.75,62.175 14.75,63.06 15.865,64.175 15.865,64.475 15.775,64.565 X1.3@15.775,65.425 ; X5.36@49.6,23.25 50.76,23.25 50.925,23.085 52.122,23.085 54.325,25.288 54.325,30.825 v1@54.1,31.05
  Mid-Layer 2 w0.22: v1(14.5,61.925) 14.803,61.622 14.803,61.272 15.275,60.8 21.525,60.8 27.976,54.349 29.153,54.349 32.547,50.955 38.384,50.955 45.934,43.405 53.995,43.405 56.05,41.35 56.05,34.15 54.325,32.425 54.325,31.299 v1(54.078,31.052)
pads on no net: 26B.0 C26A.0 E3.0 L6A.0 L6B.0 U1.4 X1.4 X2.A5 X2.A6 X2.A7 X2.A8 X2.A19 X2.A25 X2.A26 X2.A29 X2.A30 X2.A32 X2.B5 X2.B6 X2.B9 X2.B10 X2.B11 X2.B12 X2.B17 X2.B23 X2.B24 X2.B27 X2.B28 X2.B30 X2.MH1 X2.MH48 X2.MH53 X5.1 X5.6 X5.7 X5.16 X5.24 X5.28 X5.48 X5.MH0 X9.6 X9.8

## Polygon pours and split planes (outlines as drawn)
GND on Bottom Layer "GND-Mid-2" (solid, remove dead copper, pour order 0): 0,70 100,70 100,12.75 80.05,12.75 79.3,12 79.3,2 58.1,2 58.1,8 57.7,8.4 56.6,8.4 56.2,8 56.2,2 45,2 45,11.7 44,12.7 15.7,12.7 15,12 15,4.5 0,4.5
GND on Mid-Layer 1 "GND-Mid-1" (solid, remove dead copper, pour order 12): 0,70 100,70 100,12.75 80.05,12.75 79.3,12 79.3,2 58.1,2 58.1,8 57.7,8.4 56.6,8.4 56.2,8 56.2,2 45,2 45,11.7 44,12.7 15.7,12.7 15,12 15,4.5 0,4.5
GND on Mid-Layer 2 "GND-Mid-2" (solid, remove dead copper, pour order 10): 0,70 100,70 100,12.75 80.05,12.75 79.3,12 79.3,2 58.1,2 58.1,8 57.7,8.4 56.6,8.4 56.2,8 56.2,2 45,2 45,11.7 44,12.7 15.7,12.7 15,12 15,4.5 0,4.5
GND on Top Layer "GND-Mid-1" (solid, remove dead copper, pour order 8): 0,70 100,70 100,12.75 80.05,12.75 79.3,12 79.3,2 58.1,2 58.1,8 57.7,8.4 56.6,8.4 56.2,8 56.2,2 45,2 45,11.7 44,12.7 15.7,12.7 15,12 15,4.5 0,4.5

## Keep-outs
Keep-Out Layer:
  the board outline again, w0.1

## Other copper
Top Layer:
  pour cut-out: 0,14.5 28.45,14.5 28.45,4.5 0,4.5
  pour cut-out: 0,70 11,70 11,53.8 0,53.8
  text "1" at 34.95,10 h1
Mid-Layer 1:
  text "2" at 36.225,10 h1
Mid-Layer 2:
  text "3" at 37.625,10 h1
Bottom Layer:
  pour cut-out: 0,70 11,70 11,53 0,53
  pour cut-out: 0,14.5 16,14.5 16,4.5 0,4.5
  text "4" at 38.975,10 h1

## Silkscreen, mask and mechanical layers (free items; w line width, h text height)
Top Overlay:
  drawing of 2321 lines, arcs and shapes, not listed
  text "LNAout" at 61.65,68.5 h1
  text "LNAin" at 79.275,68.5 h1
  text "TXin" at 54.625,68.475 h1
  text "TRX" at 88.425,68.325 h1
  text "A" at 82.012,67 h1
  text "A" at 63.45,66.95 h1
  text "B" at 55.875,66.9 h1
  text "A" at 89.175,66.85 h1
  text "TDI" at 34.236,65.4 h1 r90
  text "GND" at 41.913,65.3 h1 r90
  text "TCK" at 39.212,65.25 h1 r90
  text "VIO" at 44.233,65.25 h1 r90
  text "TDO" at 36.7,65.2 h1 r90
  text "TMS" at 31.723,65.1 h1 r90
  text "PCIe" at 29.25,57.15 h1 r90
  text "USB" at 20.386,56.95 h1 r90
  text "VCC_RF" at 21.9,54.775 h1
  text "JTAG" at 29.121,52.325 h1.52
  text "TRX" at 54.768,47.075 h1
  text "LNAout" at 78.775,47.025 h1
  text "TXin" at 87.575,47 h1
  text "LNAin" at 62.55,46.925 h1
  text "1PPSout" at 29.4,45.69 h1
  text "B" at 55.725,45.575 h1
  text "B" at 81.85,45.55 h1
  text "1PPSin" at 36.612,45.475 h1
  text "B" at 63.525,45.425 h1
  text "A" at 89.012,45.425 h1
  text "MHZout" at 32.425,37.825 h1
  text "MHZin" at 32.262,30.625 h1
  text "USB" at 19.558,22.428 h1 r90
  text "PCIe" at 29.675,21.934 h1 r90
  text "GND" at 16.986,20.28 h1
  text "VCC_XTRX" at 11.125,14.859 h1
  text "VCC_XTRX" at 29.55,14.16 h1
  text "LimeFEA mPCIe v1.0" at 52.508,8.992 h2.6
Top Solder:
  rectangle: 0,54 10.8,70
  rectangle: 0,4.5 16.025,14.225
  rectangle: 34.5,9.5 40,11.5
  rectangle: 60,20 95,37
Bottom Solder:
  rectangle: 0,54 10.8,70
  rectangle: 0,4.5 16.025,14.225
  rectangle: 34.5,9.5 40,11.5
Mechanical 1:
  text "Placement for" at 66.275,29.213 h1.52
  text "thermalpad 15x30x0.5mm" at 62.65,26.7 h1.52

## Text inside footprints (layer, text, board x,y; h text height)
X1: Mechanical 1 "5" at 14.675,65.825 h0.5 r180; Mechanical 1 "1" at 17.075,65.925 h0.5 r180; Mechanical 1 "PCB Edge" at 21.025,69.475 h0.25 r180
X2: Mechanical 1 "Chamfered area" at 29,0.9 h1; Mechanical 1 "\/ 40 +-5 deg" at 29,-0.8 h1
X17: Mechanical 15 "1" at 14.335,20.133 h0.55 r90; Mechanical 15 "KEY" at 11.535,18.308 h0.55 r90